# Altium PCB PD Stepper V1.PcbDoc (part 1 of 2)
Units mm, origin at the board's own origin, x right, y up, seen from the top; angles counter-clockwise.
Board outline 42.3 x 42.32 mm, 4 copper layers (Top Layer, Int1 (GND), Int2 (PWR), Bottom Layer), stack 1.451 mm thick; 69 components, 55 nets, 310 pads, 250 vias.
Unrouted connection lines stored in the file: 77.
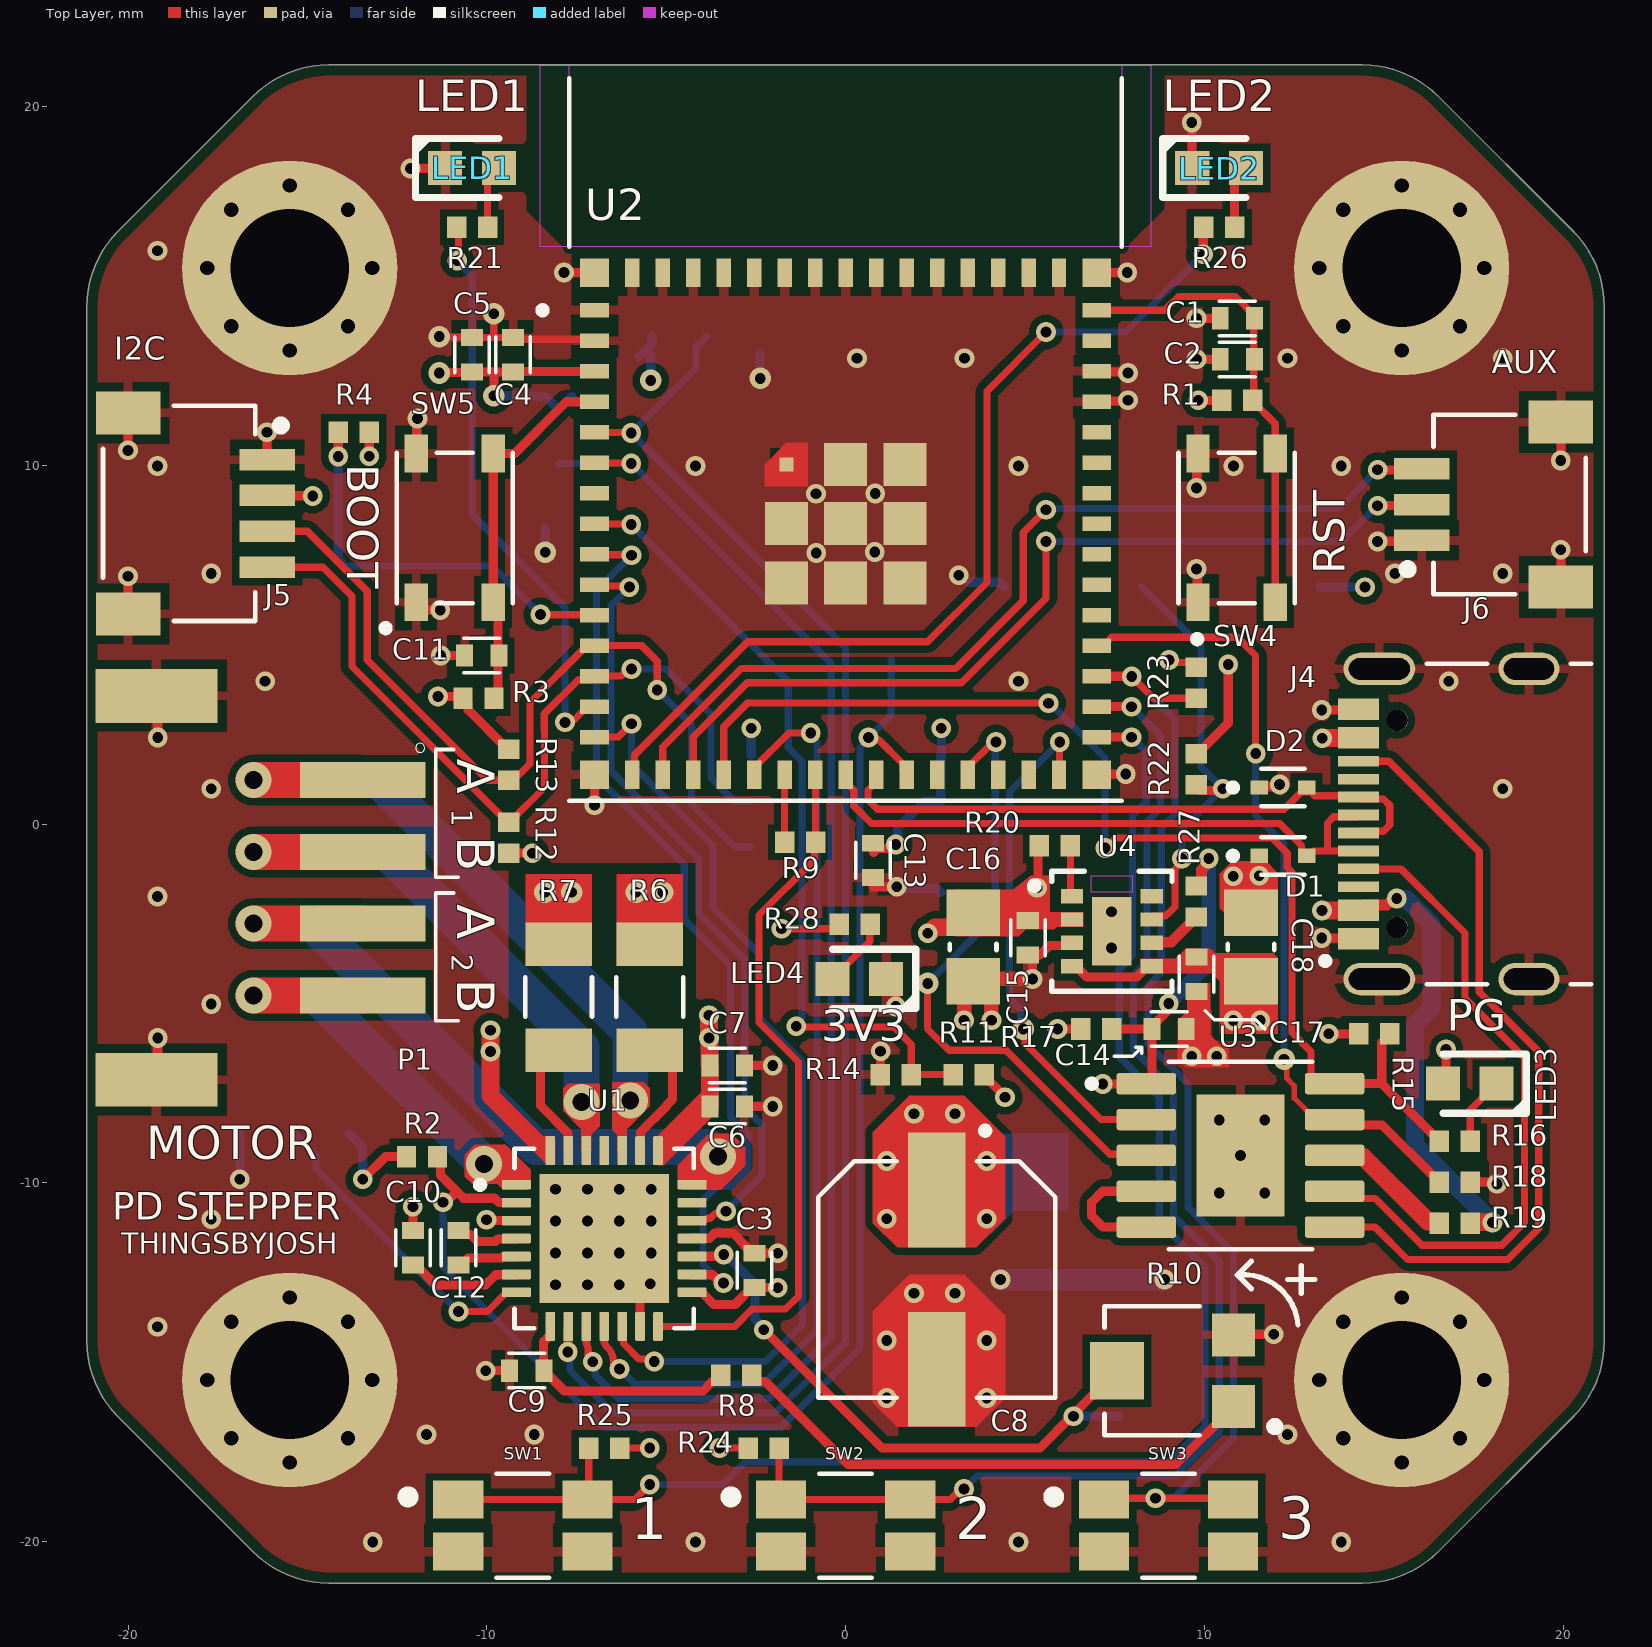
[diagram p0: Top Layer view]
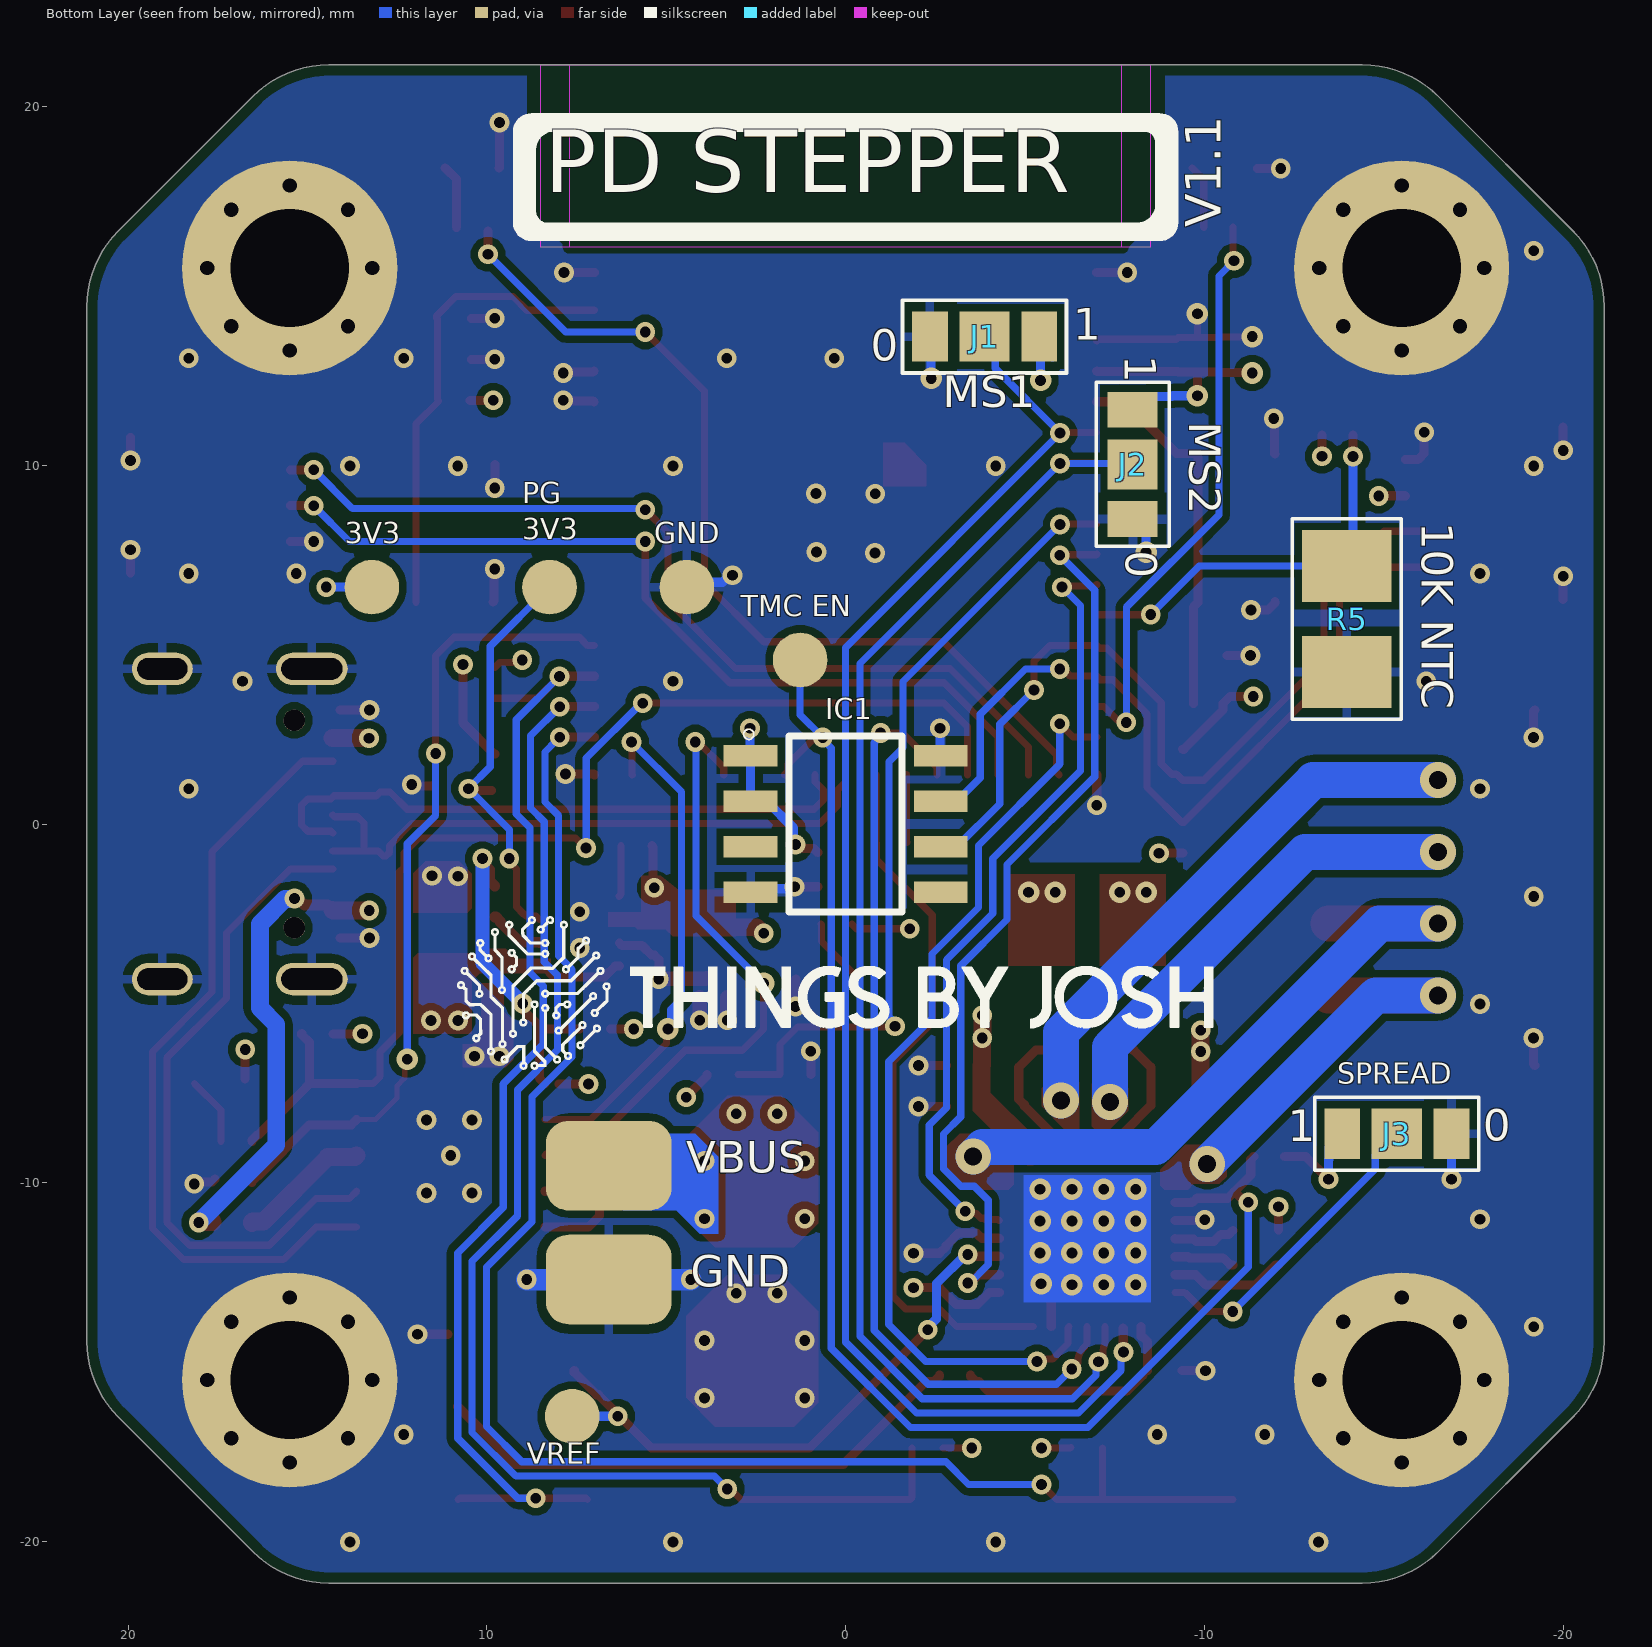
[diagram p1: Bottom Layer view, seen from below]
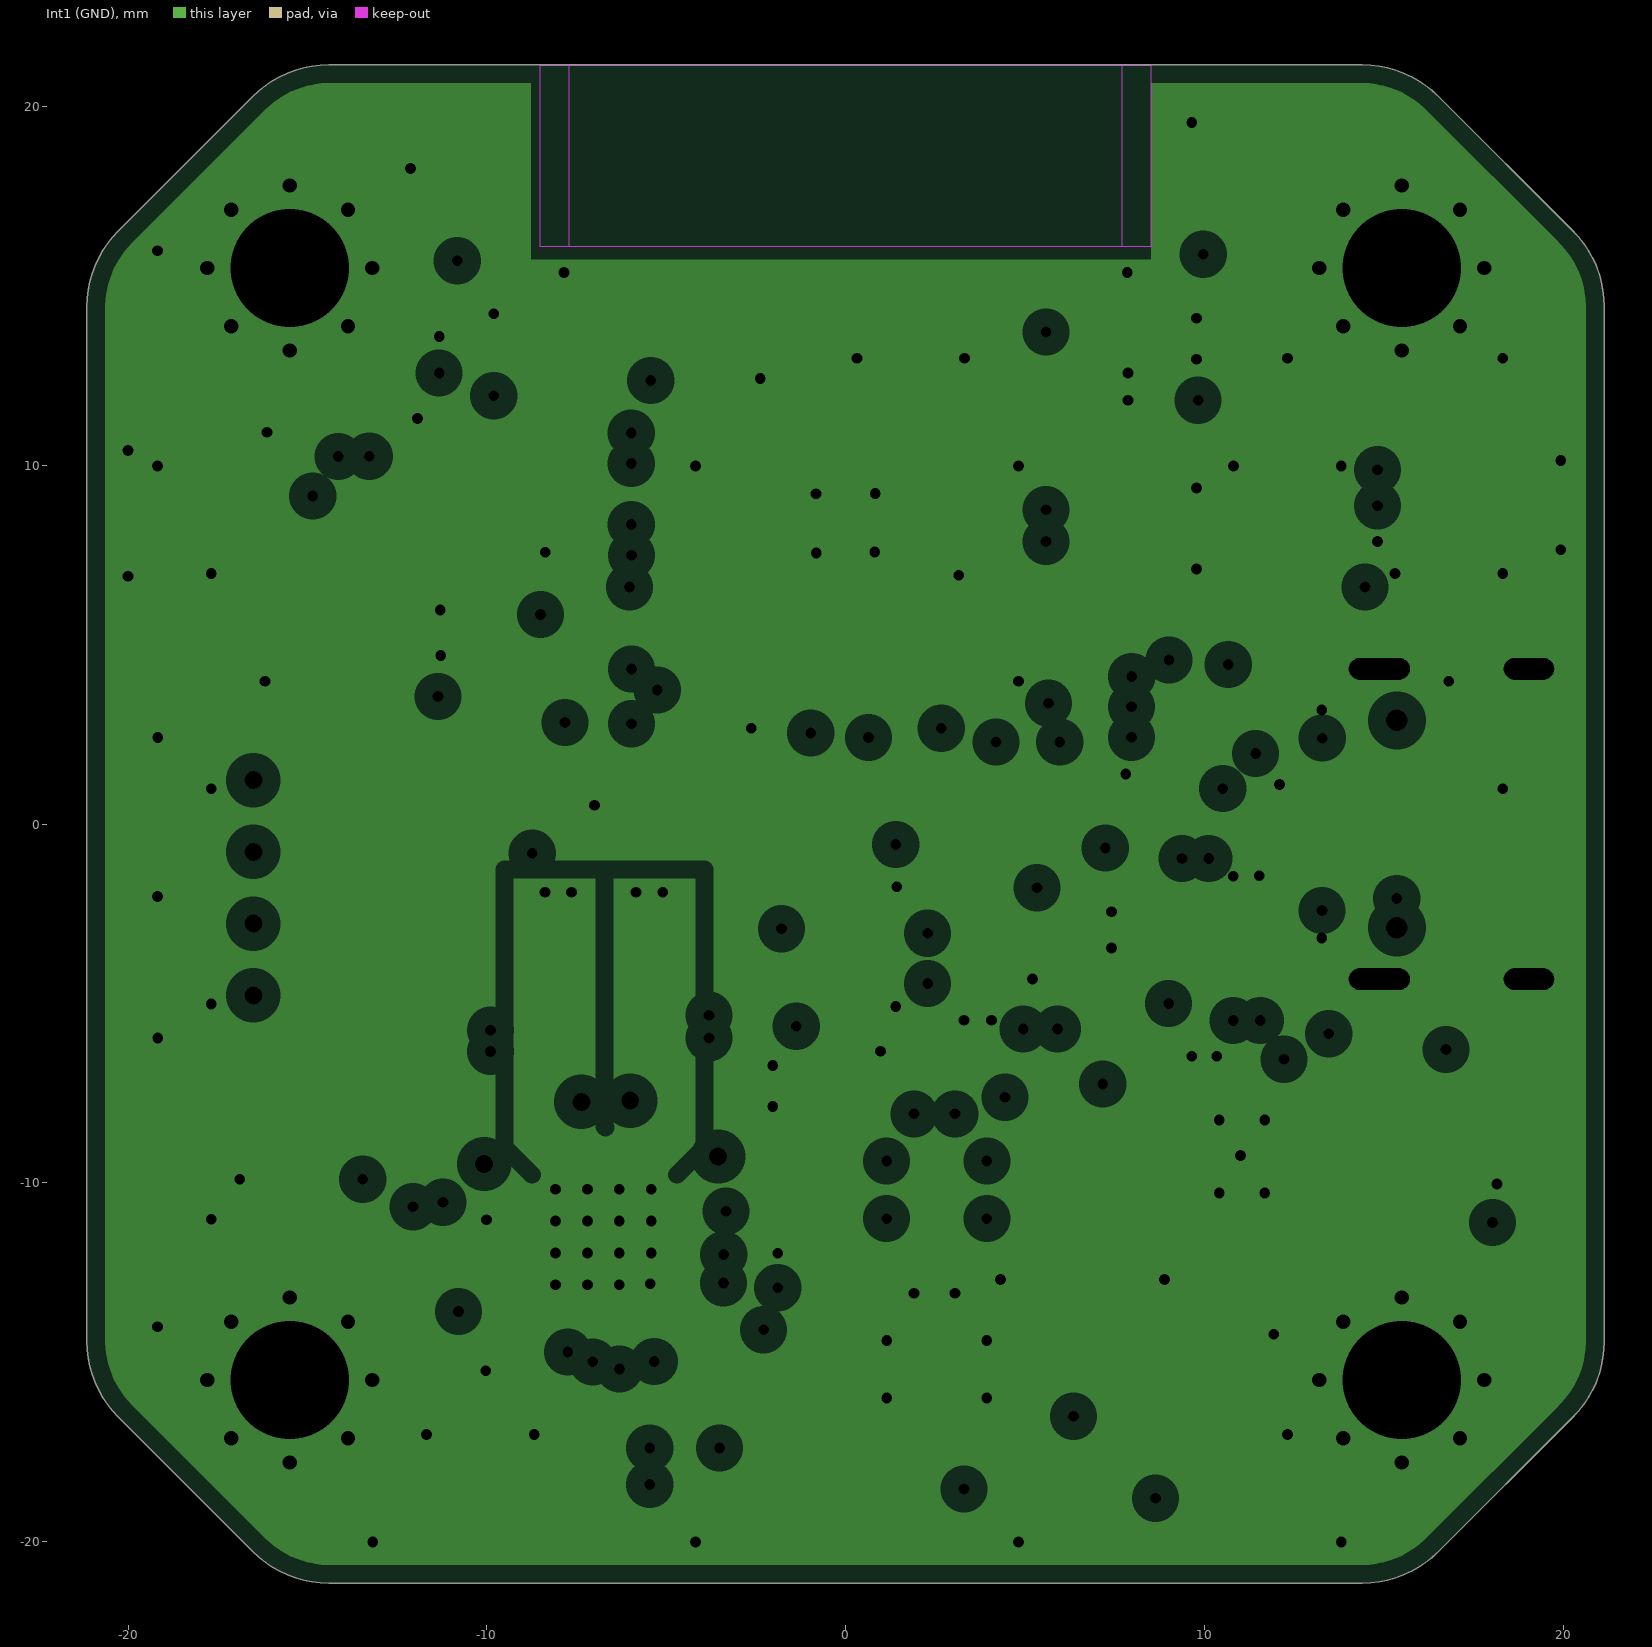
[diagram p2: Int1 (GND), clearances drawn from the general rule]
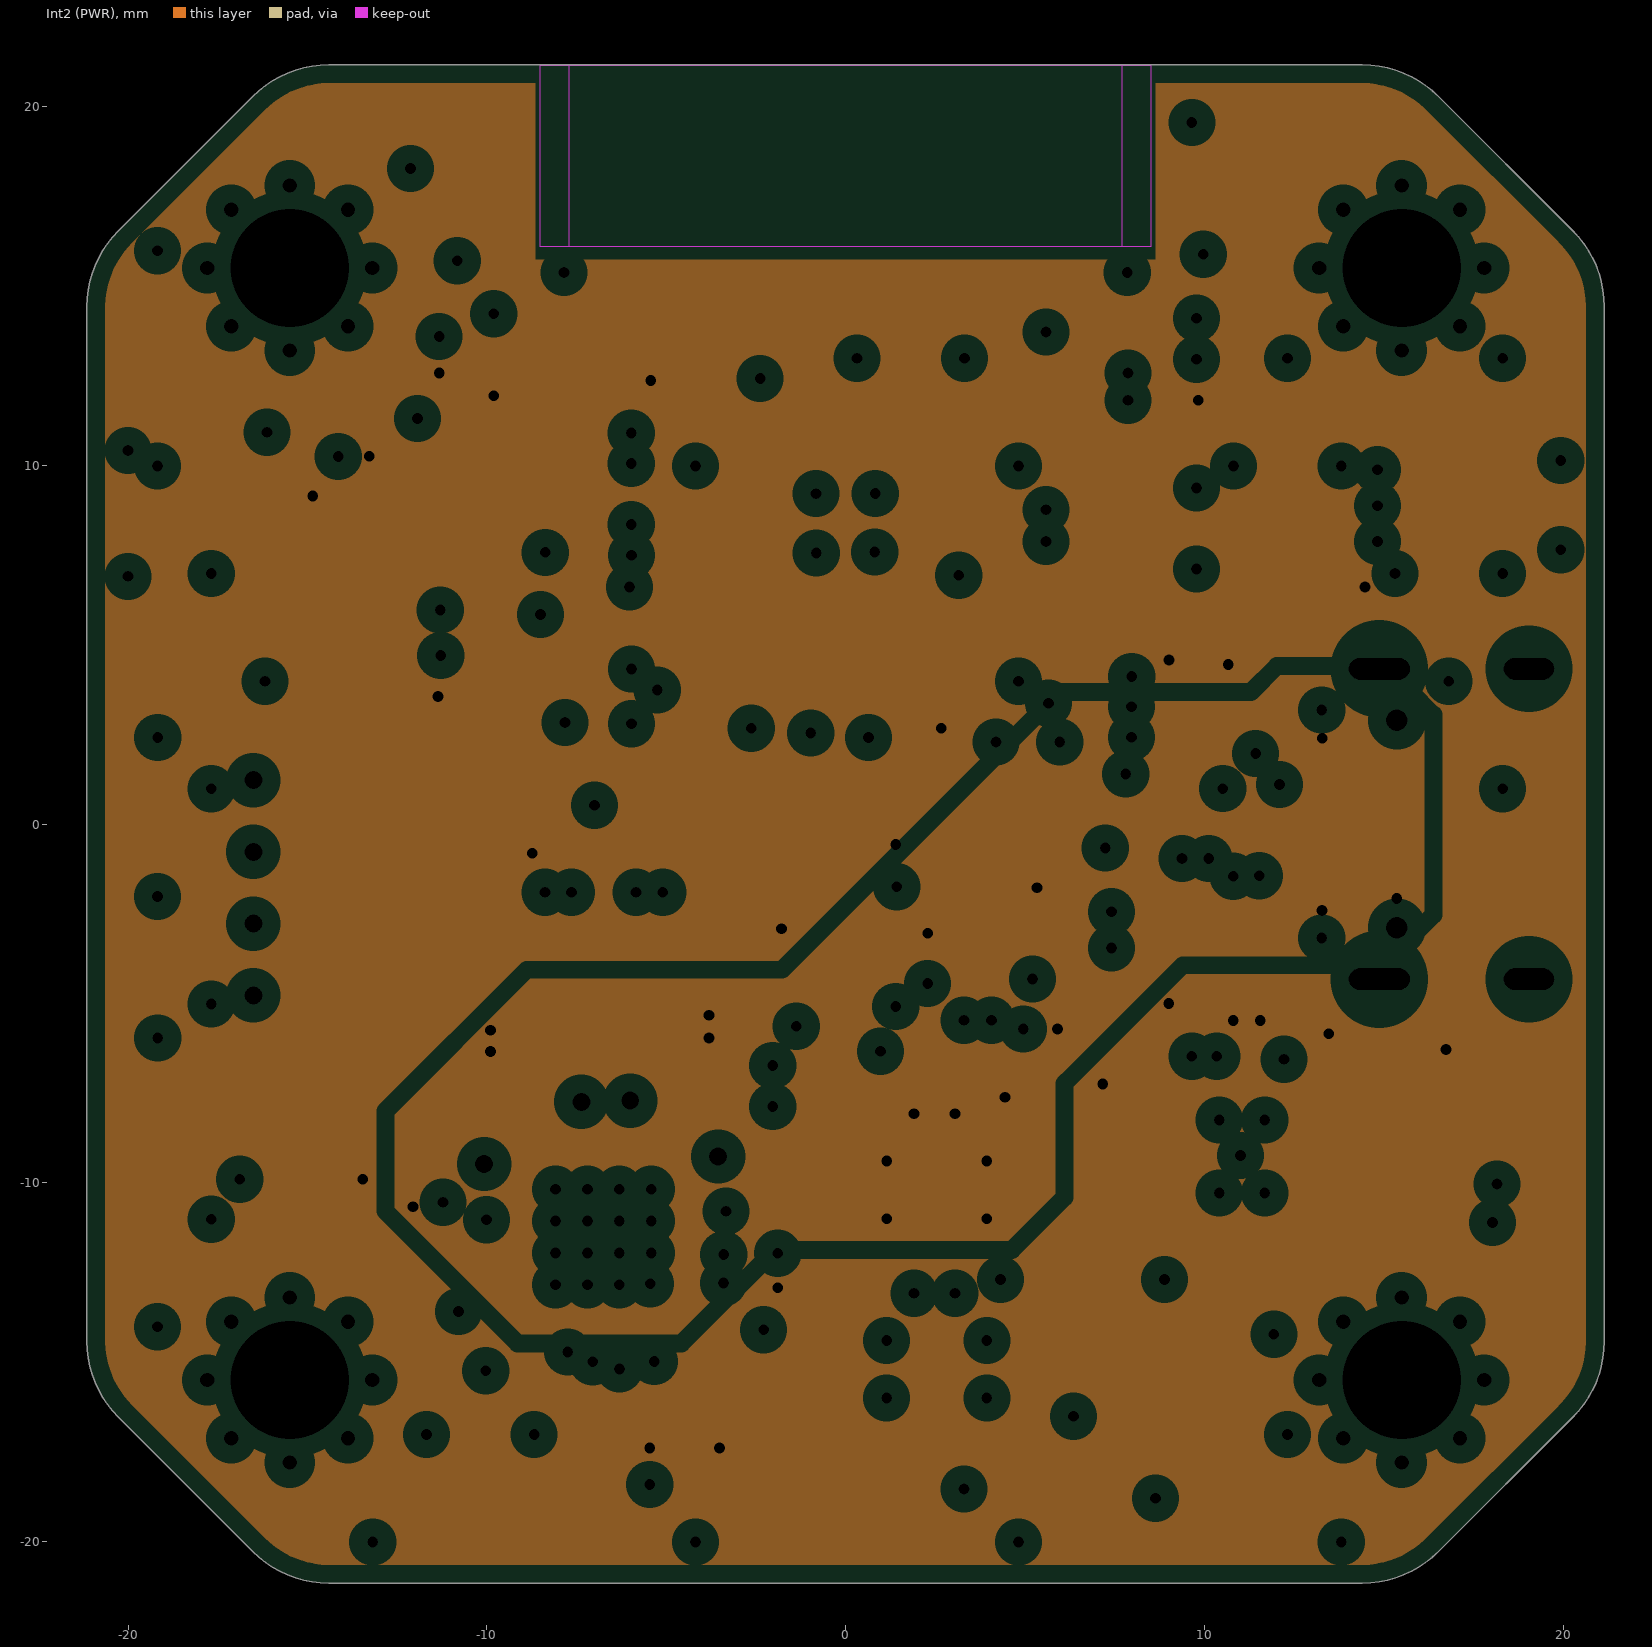
[diagram p3: Int2 (PWR), clearances drawn from the general rule]
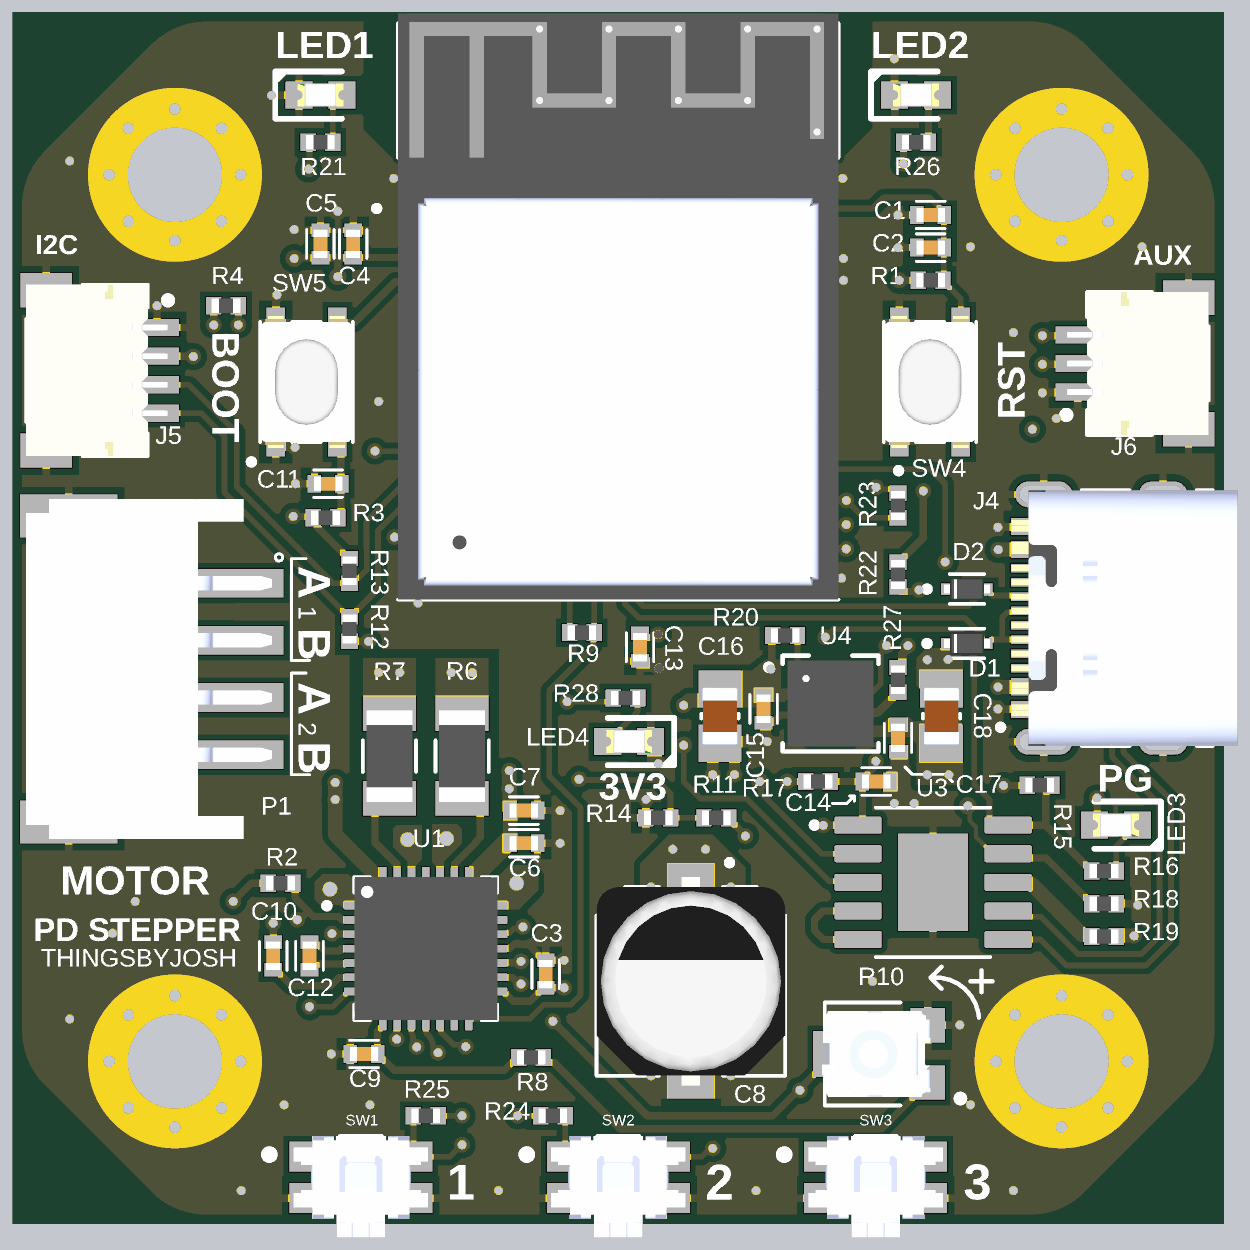
[diagram p5: 3D render of the assembled board from above, using the file's embedded part models]

## Layer stack, top to bottom
Top Solder: solder mask 0.0254, SM-001, Dk 4
Top Layer: signal copper 0.035
Dielectric 2: prepreg 0.3, PP-017, Dk 4.3
Int1 (GND): plane copper 0.035, net GND
Dielectric 3: core 0.7112, Core-039, Dk 4.8
Int2 (PWR): plane copper 0.035, net (Multiple Nets)
Dielectric 4: prepreg 0.3, PP-017, Dk 4.3
Bottom Layer: signal copper 0.035
Bottom Solder: solder mask 0.0254, SM-001, Dk 4

## Board outline
-20.271,-16.539 -16.529,-20.281 ccw(c-14.407,-18.16) -14.407,-21.16 14.407,-21.16 ccw(c14.407,-18.16) 16.529,-20.281 20.271,-16.539 ccw(c18.15,-14.417) 21.15,-14.417 21.15,14.417 ccw(c18.15,14.417) 20.271,16.539 16.529,20.281 ccw(c14.407,18.16) 14.407,21.16 -14.407,21.16 ccw(c-14.407,18.16) -16.529,20.281 -20.271,16.539 ccw(c-18.15,14.417) -21.15,14.417 -21.15,-14.417 ccw(c-18.15,-14.417)

## Design rules (kind name [scope] priority, off if disabled: settings)
BoardOutlineClearance BoardOutlineClearance_SILK [OnLayer('Top Overlay')] p1: gap=0.05 ignorepadtopadclearanceinfootprint=FALSE except(0: Arc-SplitContinuation Track-SplitContinuation SMDPad-SplitContinuation THPad-SplitContinuation Via-SplitContinuation Fill-SplitContinuation Poly-SplitContinuation Region-SplitContinuation Text-SplitContinuation)
BoardOutlineClearance [All] p2: gap=0.3 ignorepadtopadclearanceinfootprint=FALSE except(0: Arc-SplitContinuation Track-SplitContinuation SMDPad-SplitContinuation THPad-SplitContinuation Via-SplitContinuation Fill-SplitContinuation Poly-SplitContinuation Region-SplitContinuation Text-SplitContinuation; 0.2: SMDPad-OutlineEdge)
Clearance [All] p1: gap=0.2 ignorepadtopadclearanceinfootprint=TRUE except(0: Arc-Hole Track-Hole SMDPad-Hole THPad-Hole Via-Hole Fill-Hole Poly-Hole Region-Hole Text-Hole)
DiffPairsRouting [All] p1: maxlimit=0.254 minlimit=0.2 mostfreqgap=0.254 toplayer_minwidth=0.15 toplayer_maxwidth=0.381 toplayer_prefwidth=0.2 bottomlayer_minwidth=0.15 bottomlayer_maxwidth=0.381 bottomlayer_prefwidth=0.2 maxuncoupledlength=12.7
HoleSize [All] p1: absolutevalues=TRUE maxlimit=5 minlimit=0.3 maxpercent=80.000 minpercent=20.000
MinimumSolderMaskSliver [All] p1: minsoldermaskwidth=0.1
PlaneClearance [All] p1: clearance=0.508
PlaneConnect [All] p1: planeconnectstyle=Direct reliefexpansion=0.508 reliefentries=4 reliefconductorwidth=0.254 reliefairgap=0.254
PolygonConnect [All] p1: thpad.connectstyle=Relief thpad.reliefconductorwidth=0.254 thpad.reliefentries=4 thpad.polygonreliefangle="90 Angle" thpad.airgapwidth=0.254 smdpad.connectstyle=Relief smdpad.reliefconductorwidth=0.254 smdpad.reliefentries=4 smdpad.polygonreliefangle="90 Angle" smdpad.airgapwidth=0.254 via.connectstyle=Direct via.reliefconductorwidth=0.254 via.reliefentries=4 via.polygonreliefangle="90 Angle" via.airgapwidth=0.254
RoutingVias [All] p1: holewidth=0.711 width=1.27 viastyle="Through Hole" minholewidth=0.711 minwidth=1.27 maxholewidth=0.711 maxwidth=1.27
SilkToSilkClearance [All] p1: silktosilkclearance=0.1
SilkToSolderMaskClearance [IsPad] p1: minsilkscreentomaskgap=0.12 clearancetoexposedcopper=TRUE
SolderMaskExpansion [All] p1: expansion=0.04 istentingtop=FALSE
Width [All] p1: maxlimit=5 minlimit=0.13 preferedwidth=0.2 minimp=50.000000 maximp=50.000000 favimp=50.000000
23 further rules are at their usual default settings.

## Classes and differential pairs
differential pair USB_D: +USB_D_P -USB_D_N

## Components (designator, comment, footprint, x,y, rotation, side; value= is the part's Value field where it differs from the comment)
C1 "0.1µF" CAPC1005X55N 10.922,14.097 r180 top
C2 "1µF ±10% 35V" CAPC1005X55N 10.922,12.954 r180 top
C3 "0.1µF" CAPC1005X55N -2.54,-12.446 r90 top
C4 "1µF ±10% 35V" CAPC1005X55N -9.271,13.081 r90 top
C5 "10uF 6.3V" CAPC1005X55N -10.414,13.081 r90 top
C6 "0.1µF" CAPC1005X55N -3.302,-7.874 r180 top
C7 "0.1µF" CAPC1005X55N -3.302,-6.731 r180 top
C8 "100uF" CAP_EEEFT1V101AP 2.54,-12.7 r270 top
C9 "0.1µF" CAPC1005X55N -8.89,-15.24 r180 top
C10 "0.1µF" CAPC1005X55N -12.065,-11.811 r90 top
C11 "0.1µF" CAPC1005X55N -10.144,4.699 r180 top
C12 "22nF" CAPC1005X55N -10.795,-11.811 r270 top
C13 "0.1µF" CAPC1005X55N 0.762,-1.016 r270 top
C14 "1µF ±10% 35V" CAPC1005X55N 9.017,-5.715 r180 top
C15 "0.1µF" CAPC1005X55N 5.08,-3.175 r90 top
C16 "22uF" CAPC2012X135N 3.556,-3.429 r270 top
C17 "0.1µF" CAPC1005X55N 9.779,-4.191 r90 top
C18 "22uF" CAPC2012X135N 11.303,-3.429 r90 top
D1 "LESD5D5.0CT1G" TVS_LESD5D5.0CT1G 12.192,-0.889 r0 top
D2 "LESD5D5.0CT1G" TVS_LESD5D5.0CT1G 12.192,1.016 r0 top
IC1 "AS5600-ASOT" SOIC127P600X175-8N 0,0 r180 bottom
J1 "MS1" "3 way solder jumper" -3.872,13.589 r0 bottom
J2 "MS2" "3 way solder jumper" -8.001,10.025 r270 bottom
J3 "SPREAD" "3 way solder jumper" -15.367,-8.636 r180 bottom
J4 "TYPE-C-31-M-12" HRO_TYPE-C-31-M-12 19.05,0 r90 top
J5 "JST SH 4P" JST_SM04B-SRSS-TB(LF)(SN) -16.129,8.66 r270 top value=I2C
J6 "JST SH 3P" JST_SM03B-SRSS-TB(LF)(SN) 16.064,8.904 r90 top value=AUX
LED1 "LED BLUE" LEDC1608X80N -10.414,18.288 r0 top
LED2 "LED RED" LEDC1608X80N 10.414,18.288 r0 top
LED3 "LED GREEN" LEDC1608X80N 17.399,-7.239 r180 top
LED4 "LED GREEN" LEDC1608X80N 0.381,-4.318 r180 top
P1 "JST PH 4P" JST_S4B-PH-SM4-TB -13.462,-1.778 r90 top value=MOTOR
R1 "4.7K" RESC1005X37N 10.922,11.811 r180 top
R2 "10K" RESC1005X37N -11.811,-9.271 r180 top
R3 "10K" RESC1005X37N -10.235,3.51 r180 top
R4 "10K" RESC1005X37N -13.716,10.922 r180 top
R5 "10K NTC" "NTC Pads" -13.97,5.715 r90 bottom
R6 "100m" RESC3216X89N -5.461,-4.826 r90 top
R7 "100m" RESC3216X89N -8.001,-4.826 r90 top
R8 "20K" RESC1005X37N -3.048,-15.367 r180 top
R9 "1K" RESC1005X37N -1.27,-0.508 r0 top
R10 "20K POT" TRIM_TC33X-2-203E 9.017,-15.24 r180 top
R11 "20K" RESC1005X37N 3.429,-6.985 r0 top
R12 "4.7K" RESC1005X37N -9.398,-0.381 r270 top
R13 "4.7K" RESC1005X37N -9.398,1.651 r90 top
R14 "2.7K" RESC1005X37N 1.397,-6.985 r0 top
R15 "10K" RESC1005X37N 14.732,-5.842 r180 top
R16 "1K" RESC1005X37N 16.983,-8.844 r0 top
R17 "1K" RESC1005X37N 6.985,-5.715 r180 top
R18 "NF" RESC1005X37N 16.983,-9.987 r0 top
R19 "10K" RESC1005X37N 16.983,-11.13 r180 top
R20 "100K" RESC1005X37N 5.834,-0.607 r180 top
R21 "1K" RESC1005X37N -10.414,16.637 r180 top
R22 "100K" RESC1005X37N 9.779,1.524 r90 top
R23 "10K" RESC1005X37N 9.779,3.937 r90 top
R24 "10K" RESC1005X37N -2.286,-17.399 r180 top
R25 "10K" RESC1005X37N -6.731,-17.399 r0 top
R26 "1K" RESC1005X37N 10.414,16.637 r180 top
R27 "10K" RESC1005X37N 9.779,-2.159 r90 top
R28 "1K" RESC1005X37N 0.254,-2.794 r180 top
SW1 "EVQ-P7J01P" SW_EVQ-P7J01P -9,-19.558 r0 top
SW2 "EVQ-P7J01P" SW_EVQ-P7J01P 0,-19.558 r0 top
SW3 "EVQ-P7J01P" SW_EVQ-P7J01P 9,-19.558 r0 top
SW4 "PTS810_SJM_250_SMTR_LFS" SW_PTS810_SJM_250_SMTR_LFS 10.9,8.255 r90 top
SW5 "PTS810_SJM_250_SMTR_LFS" SW_PTS810_SJM_250_SMTR_LFS -10.9,8.255 r90 top
U1 "TMC2209-LA" QFN50P500X500X90-29N -6.731,-11.557 r0 top
U2 "ESP32-S3-MINI-1-N8" XCVR_ESP32-S3-MINI-1-N8 0,8.372 r0 top
U3 "CH224K" ESSOP-10 11.007,-9.239 r0 top
U4 "MPM3612-33" LGA_MPM3612_MNP 7.422,-2.988 r0 top

## Footprints (in the part's own frame and the unit in brackets; to place one, negate y for a bottom-side part, rotate by r counter-clockwise, add the part's x,y. Pads: shape width x height; smd on the part's side, far side on the other; paste and mask are expansions set on the pad)
"3 way solder jumper" [mm]
  rect 1x1.4 smd paste-2539.97: 1(-1.524,0) 3(1.524,0)
  rect 1.4x1.4 smd paste-2539.97: 2(0,0)
CAP_EEEFT1V101AP [mm]
  rect 3.2x1.6 smd: 1(-2.5,0) 2(2.5,0)
  silkscreen extent -4.25,-3.3 3.3,3.3, body extent -3.65,-3.3 3.65,3.3, height 5.8
CAPC1005X55N [mm]
  rect 0.47x0.62 smd: 1(-0.48,0) 2(0.48,0)
  silkscreen extent -0.5,-0.48 0.5,0.48, body extent -0.5,-0.25 0.5,0.25, height 0.55
CAPC2012X135N [mm]
  rect 1.3x1.5 smd: 1(-0.95,0) 2(0.95,0)
  silkscreen extent -0.08,-0.65 0.08,0.65, body extent -1,-0.63 1,0.63, height 1.44
ESSOP-10 [mm]
  rect 2.45x3.4 smd: 0(0,0)
  rrect25% 1.66x0.6 smd: 1(-2.625,2) 2(-2.625,1) 3(-2.625,0) 4(-2.625,-1) 5(-2.625,-2) 6(2.625,-2) 7(2.625,-1) 8(2.625,0) 9(2.625,1) 10(2.625,2)
  silkscreen extent -4.25,-2.61 2,2.61, body extent -2,-2.54 2,2.54, height 1.8
HRO_TYPE-C-31-M-12 [mm]
  rect 0.6x1.14 smd mask+0.05: A1_B12(-3.2,4.75) A4_B9(-2.4,4.75) B1_A12(3.2,4.75) B4_A9(2.4,4.75)
  rect 0.3x1.14 smd mask+0.05: A5(-1.25,4.75) A6(-0.25,4.75) A7(0.25,4.75) A8(1.25,4.75) B5(1.75,4.75) B6(0.75,4.75) B7(-0.75,4.75) B8(-1.75,4.75)
  oval 0.9x2 hole 0.6 slot 1.7 at 90 deg: S1(-4.325,4.17) S2(4.325,4.17)
  oval 0.9x1.7 hole 0.6 slot 1.4 at 90 deg: S3(-4.325,0) S4(4.325,0)
  round 0.6 hole 0.6 unplated: ""(-2.89,3.68) ""(2.89,3.68)
  silkscreen extent -4.47,-1.74 4.47,5.78, body extent -4.47,-2.6 4.47,5.31, height 3.31
JST_S4B-PH-SM4-TB [mm]
  rect 1x3.5 smd: 1(3,0) 2(1,0) 3(-1,0) 4(-3,0)
  rect 1.5x3.4 smd: P1(5.35,5.75) P2(-5.35,5.75)
  silkscreen extent 3.77,-1.73 4.03,-1.47, body extent -5.95,-1.36 5.95,7.24, height 5.5
JST_SM03B-SRSS-TB(LF)(SN) [mm]
  rect 0.6x1.55 smd: 1(-1,0) 2(0,0) 3(1,0)
  rect 1.2x1.8 smd: S1(-2.3,-3.875) S2(2.3,-3.875)
  silkscreen extent -2.5,-4.57 2.5,0.5, body extent -2.5,-4.57 2.5,0.38, height 3.25
JST_SM04B-SRSS-TB(LF)(SN) [mm]
  rect 0.6x1.55 smd: 1(-1.5,0) 2(-0.5,0) 3(0.5,0) 4(1.5,0)
  rect 1.2x1.8 smd: S1(-2.8,-3.875) S2(2.8,-3.875)
  silkscreen extent -3,-4.57 3,0.49, body extent -3,-4.57 3,0.38, height 3.25
LEDC1608X80N [mm]
  rect 0.95x0.95 smd: 1(-0.75,0) 2(0.75,0)
  silkscreen extent -1.58,-0.82 0.75,0.82, body extent -0.8,-0.4 0.8,0.4, height 0.8
LGA_MPM3612_MNP [mm]
  rect 0.625x0.4 smd paste+0 mask+0: 1(-1.112,0.975) 2(-1.112,0.325) 3(-1.112,-0.325) 4(-1.112,-0.975) 5(1.112,-0.975) 6(1.112,-0.325) 7(1.112,0.325) 8(1.112,0.975)
  rect 1.1x1.9 smd paste+0 mask+0: 11(0,0)
  Top Layer keep-out region: -0.575,1.083 -0.575,1.55 0.575,1.55 0.575,1.083
  silkscreen extent -2.26,-1.68 1.68,1.68, body extent -1.5,-1.5 1.5,1.5, height 1.94
"NTC Pads" [mm]
  rect 2x2.5 smd paste-2539.97: 1(-1.476,0) 2(1.476,0)
QFN50P500X500X90-29N [mm]
  rrect25% 0.81x0.27 smd: 1(-2.45,1.5) 2(-2.45,1) 3(-2.45,0.5) 4(-2.45,0) 5(-2.45,-0.5) 6(-2.45,-1) 7(-2.45,-1.5) 15(2.45,-1.5) 16(2.45,-1) 17(2.45,-0.5) 18(2.45,0) 19(2.45,0.5) 20(2.45,1) 21(2.45,1.5)
  rrect25% 0.27x0.81 smd: 8(-1.5,-2.45) 9(-1,-2.45) 10(-0.5,-2.45) 11(0,-2.45) 12(0.5,-2.45) 13(1,-2.45) 14(1.5,-2.45) 22(1.5,2.45) 23(1,2.45) 24(0.5,2.45) 25(0,2.45) 26(-0.5,2.45) 27(-1,2.45) 28(-1.5,2.45)
  rect 3.6x3.6 smd paste-0.68: 29(0,0)
  silkscreen extent -3.56,-2.5 2.5,2.5, body extent -2.5,-2.5 2.5,2.5, height 0.9
RESC1005X37N [mm]
  rect 0.54x0.6 smd: 1(-0.432,0) 2(0.432,0)
  body extent -0.5,-0.25 0.5,0.25, height 0.37
RESC3216X89N [mm]
  rect 1.21x1.86 smd: 1(-1.476,0) 2(1.476,0)
  silkscreen extent -0.55,-0.93 0.55,0.93, body extent -1.6,-0.8 1.6,0.8, height 0.89
SOIC127P600X175-8N [mm]
  rect 1.5x0.6 smd: 1(-2.65,1.905) 2(-2.65,0.635) 3(-2.65,-0.635) 4(-2.65,-1.905) 5(2.65,-1.905) 6(2.65,-0.635) 7(2.65,0.635) 8(2.65,1.905)
  silkscreen extent -2.84,-2.45 1.58,2.64, body extent -3,-2.45 3,2.45, height 1.75
SW_EVQ-P7J01P [mm]
  rect 1.4x1.05 smd: 1_1(-1.8,0.725) 1_2(1.8,0.725) 2_1(-1.8,-0.725) 2_2(1.8,-0.725)
  silkscreen extent -3.34,-1.45 0.73,1.45, body extent -2.35,-2.1 2.35,1.45, height 1.35
SW_PTS810_SJM_250_SMTR_LFS [mm]
  rect 1.05x0.65 smd: 1(-2.075,1.075) 2(2.075,1.075) 3(-2.075,-1.075) 4(2.075,-1.075)
  silkscreen extent -3.2,-1.62 2.1,1.62, body extent -2.3,-1.6 2.3,1.6, height 2.7
TRIM_TC33X-2-203E [mm]
  rect 1.2x1.2 smd: 1(-1.8,1) 3(-1.8,-1)
  rect 1.5x1.6 smd: 2(1.45,0)
  silkscreen extent -3.07,-1.8 1.8,1.8, body extent -1.9,-1.5 1.9,1.5, height 1.1
TVS_LESD5D5.0CT1G [mm]
  rect 0.48x0.4 smd: 1(-0.66,0) 2(0.66,0)
  silkscreen extent -1.5,-0.52 0.6,0.52, body extent -0.8,-0.4 0.8,0.4, height 0.7
XCVR_ESP32-S3-MINI-1-N8 [mm]
  rect 0.8x0.4 smd: 1(-7,5.95) 2(-7,5.1) 3(-7,4.25) 4(-7,3.4) 5(-7,2.55) 6(-7,1.7) 7(-7,0.85) 8(-7,0) 9(-7,-0.85) 10(-7,-1.7) 11(-7,-2.55) 12(-7,-3.4) 13(-7,-4.25) 14(-7,-5.1) 15(-7,-5.95) 31(7,-5.95) 32(7,-5.1) 33(7,-4.25) 34(7,-3.4) 35(7,-2.55) 36(7,-1.7) 37(7,-0.85) 38(7,0) 39(7,0.85) 40(7,1.7) 41(7,2.55) 42(7,3.4) 43(7,4.25) 44(7,5.1) 45(7,5.95)
  rect 0.4x0.8 smd: 16(-5.95,-7) 17(-5.1,-7) 18(-4.25,-7) 19(-3.4,-7) 20(-2.55,-7) 21(-1.7,-7) 22(-0.85,-7) 23(0,-7) 24(0.85,-7) 25(1.7,-7) 26(2.55,-7) 27(3.4,-7) 28(4.25,-7) 29(5.1,-7) 30(5.95,-7) 46(5.95,7) 47(5.1,7) 48(4.25,7) 49(3.4,7) 50(2.55,7) 51(1.7,7) 52(0.85,7) 53(0,7) 54(-0.85,7) 55(-1.7,7) 56(-2.55,7) 57(-3.4,7) 58(-4.25,7) 59(-5.1,7) 60(-5.95,7)
  rect 1.2x1.2 smd: 61(0,0) 61_2(0,1.65) 61_3(1.65,1.65) 61_4(1.65,0) 61_5(1.65,-1.65) 61_6(0,-1.65) 61_7(-1.65,-1.65) 61_8(-1.65,0)
  rect 0.4x0.4 smd paste-1 mask+0: 61_1(-1.65,1.65)
  rect 0.8x0.8 smd: 62(-7,7) 63(-7,-7) 64(7,-7) 65(7,7)
  Top Layer region: -1.05,1.05 -2.25,1.05 -2.25,1.65 -1.65,2.25 -1.05,2.25
  Keep-Out Layer region: 7.7,7.725 -7.7,7.725 -7.7,12.775 7.7,12.775
  Keep-Out Layer region: 8.509,7.725 -8.509,7.725 -8.509,12.775 8.509,12.775
  silkscreen extent -8.55,-7.73 7.7,12.42, body extent -7.7,-7.73 7.7,12.78, height 2.55

## Part data
C1 C3 C6 C7 C9 C10 C11 C13 C15 C17: library part CL05A105KL5NRNC, "CAP 0.1µF 35V 0402", Package="0402 Samsung", Voltage=35V, Availability=Warning, Check_prices=0.1µF, DigiKey-Purchase-URL=https://snapeda.com/shop?store=DigiKey&id=3598233, MF=Samsung, Mouser-Purchase-URL=https://snapeda.com/shop?store=Mouser&id=3598233, MP=CL05A105KL5NRNC, Price=None, SnapEDA_Link=https://www.snapeda.com/parts/CL05A105KL5NRNC/Samsung/view-part/3598233/?ref=snap
C2 C4 C14: library part CL05A105KL5NRNC, "CAP 1µF ±10% 35V Ceramic Capacitor X5R 0402 (1005 Metric)", Package="0402 Samsung", Voltage=35V, Availability=Warning, Check_prices=1µF, DigiKey-Purchase-URL=https://snapeda.com/shop?store=DigiKey&id=3598233, MF=Samsung, Mouser-Purchase-URL=https://snapeda.com/shop?store=Mouser&id=3598233, MP=CL05A105KL5NRNC, Price=None, SnapEDA_Link=https://www.snapeda.com/parts/CL05A105KL5NRNC/Samsung/view-part/3598233/?ref=snap
C5: library part CL05A105KL5NRNC, "CAP 10µF 6.3V 0402", Package="0402 Samsung", Voltage=6.3V, Availability=Warning, Check_prices=10µF, DigiKey-Purchase-URL=https://snapeda.com/shop?store=DigiKey&id=3598233, MF=Samsung, Mouser-Purchase-URL=https://snapeda.com/shop?store=Mouser&id=3598233, MP=CL05A105KL5NRNC, Price=None, SnapEDA_Link=https://www.snapeda.com/parts/CL05A105KL5NRNC/Samsung/view-part/3598233/?ref=snap
C8: library part EEEFT1V101AP, "CAP 100µF 35V 260mOhm @ 100kHz 2000 Hrs @ 105°C", Package="RADIAL-2 Panasonic", Voltage=35V, Availability="In Stock", Check_prices=https://www.snapeda.com/parts/EEE-FT1V101AP/Panasonic%20Electronic%20Components/view-part/423624/?ref=eda, MF=Panasonic, MP=EEE-FT1V101AP, Price=None, Purchase-URL=https://pricing.snapeda.com/search/part/EEE-FT1V101AP/?ref=eda, SnapEDA_Link=https://www.snapeda.com/parts/EEE-FT1V101AP/Panasonic%20Electronic%20Components/view-part/423624/?ref=snap
C12: library part CL05A105KL5NRNC, "CAP 22nF 50V 0402", Package="0402 Samsung", Voltage=50V, Availability=Warning, Check_prices=22nF, DigiKey-Purchase-URL=https://snapeda.com/shop?store=DigiKey&id=3598233, MF=Samsung, Mouser-Purchase-URL=https://snapeda.com/shop?store=Mouser&id=3598233, MP=CL05A105KL5NRNC, Price=None, SnapEDA_Link=https://www.snapeda.com/parts/CL05A105KL5NRNC/Samsung/view-part/3598233/?ref=snap
C16 C18: library part GRM21BR61E226ME44K, "CAP 22uF 25V", Package="0805 Murata", Voltage=25V, Availability=Unavailable, Check_prices=https://www.snapeda.com/parts/GRM21BR61E226ME44K/Murata%20Electronics%20North%20America/view-part/1836557/?ref=eda, MF="Murata Electronics", MP=GRM21BR61E226ME44K, Price=None, SnapEDA_Link=https://www.snapeda.com/parts/GRM21BR61E226ME44K/Murata%20Electronics%20North%20America/view-part/1836557/?ref=snap
D1 D2: "Transient Voltage Suppressors for ESD Protection", Package=None, Availability="Not in stock", Check_prices=https://www.snapeda.com/parts/LESD5D5.0CT1G/Leshan+Radio+Co./view-part/?ref=eda, MF="Leshan Radio Co.", MP=LESD5D5.0CT1G, Price=None, SnapEDA_Link=https://www.snapeda.com/parts/LESD5D5.0CT1G/Leshan+Radio+Co./view-part/?ref=snap
IC1: "Hall Effect Sensor Angle External Magnet, Not Included Gull Wing", Package="SOIC-8 ams", Availability="In Stock", Check_prices=https://www.snapeda.com/parts/AS5600-ASOT/ams/view-part/?ref=eda, MF=ams, MP=AS5600-ASOT, Price=None, Purchase-URL=https://pricing.snapeda.com/search/part/AS5600-ASOT/?ref=eda, SnapEDA_Link=https://www.snapeda.com/parts/AS5600-ASOT/ams/view-part/?ref=snap
J1 J2 J3: library part "3 Way Solder Jumper"
J4: "USB Connectors 24 Receptacle 1 8.94*7.3mm RoHS", Package=Package, Availability="Not in stock", Check_prices=https://www.snapeda.com/parts/TYPE-C-31-M-12/HRO+Electronics+Co.%252C+Ltd./view-part/?ref=eda, MF="HRO Electronics Co., Ltd.", MP=TYPE-C-31-M-12, Price=None, SnapEDA_Link=https://www.snapeda.com/parts/TYPE-C-31-M-12/HRO+Electronics+Co.%252C+Ltd./view-part/?ref=snap
J5: library part SM04B-SRSS-TB(LF)(SN), "SH Series 1.0 mm Pitch 2 Position Single Row Side Entry Shrouded Header", Package=None, Availability=Unavailable, MP=SM04B-SRSS-TB(LF)(SN), Price=None
J6: library part SM03B-SRSS-TB(LF)(SN), "Connector Header Surface Mount, Right Angle 3 position 0.039 _1.00mm_", Package=None, Availability=Unavailable, MF="JST Sales", MP=SM03B-SRSS-TB_LF__SN_, Price=None, SnapEDA_Link=https://www.snapeda.com/parts/SM03B-SRSS-TB%28LF%29%28SN%29/JST%20Sales%20America%20Inc./view-part/3227115/?ref=snap
LED1: library part 150060GS75000, "BLUE LED Indication - 0603 (1608 Metric)", Package="0603 WÃ¼rth Elektronik", 150060GS75000=150060GS75000, Availability=Warning, DigiKey-Purchase-URL=https://snapeda.com/shop?store=DigiKey&id=548131, MF="Wurth Electronics", Mouser-Purchase-URL=https://snapeda.com/shop?store=Mouser&id=548131, MP=150060GS75000, Price=None, SnapEDA_Link=https://www.snapeda.com/parts/150060GS75000/Wurth%20Electronics%20Inc./view-part/548131/?ref=snap
LED2: library part 150060GS75000, "RED LED Indication - 0603 (1608 Metric)", Availability=Warning, DigiKey-Purchase-URL=https://snapeda.com/shop?store=DigiKey&id=548131, MF="Wurth Electronics", Mouser-Purchase-URL=https://snapeda.com/shop?store=Mouser&id=548131, Price=None
LED3 LED4: library part 150060GS75000, "Green 520nm LED Indication - Discrete 3.2V 0603 (1608 Metric)", Package="0603 WÃ¼rth Elektronik", 150060GS75000=150060GS75000, Availability=Warning, DigiKey-Purchase-URL=https://snapeda.com/shop?store=DigiKey&id=548131, MF="Wurth Electronics", Mouser-Purchase-URL=https://snapeda.com/shop?store=Mouser&id=548131, MP=150060GS75000, Price=None, SnapEDA_Link=https://www.snapeda.com/parts/150060GS75000/Wurth%20Electronics%20Inc./view-part/548131/?ref=snap
P1: library part S4B-PH-SM4-TB, "Connector Header Surface Mount, Right Angle 4 position 0.079 _2.00mm_", Package=None, Availability=Unavailable, MF="JST Sales", MP=S4B-PH-SM4-TB, Price=None, SnapEDA_Link=https://www.snapeda.com/parts/S4B-PH-SM4-TB/JST%20Sales%20America%20Inc./view-part/473686/?ref=snap
R1 R12 R13: library part AC0402JR-0724KL, "RES 4.7K 0402", Package=None, Availability=Unavailable, MP=AC0402JR-0724KL, Price=None
R2 R3 R4 R15 R19 R23 R24 R25 R27: library part AC0402JR-0724KL, "RES 10K 0402", Package=None, Availability=Unavailable, MP=AC0402JR-0724KL, Price=None
R5: library part NTC, "NTC 10K"
R6 R7: library part PE1206FRF470R1L, "Res Metal Foil 1206 100m Ohm 1% 1W Â±100ppm/Â°C Molded SMD Paper T/R", Package=None, Availability=Unavailable, MP=PE1206FRF470R1L, Price=None
R8 R11: library part AC0402JR-0724KL, "RES 20K 0402", Package=None, Availability=Unavailable, MP=AC0402JR-0724KL, Price=None
R9 R16 R17 R21 R26 R28: library part AC0402JR-0724KL, "RES 1K 0402", Package=None, Availability=Unavailable, MP=AC0402JR-0724KL, Price=None
R10: library part TC33X-2-203E, "20k Ohms 0.1W, 1/10W J Lead Surface Mount Trimmer Potentiometer Cermet 1 Turn Top Adjustment", Package="1608 Bourns", Check_prices=https://www.snapeda.com/parts/TC33X-2-203E/Bourns/view-part/312812/?ref=eda, Digi-Key_Part_Number=TC33X-2-203ECT-ND, MF=Bourns, MP=TC33X-2-203E, Purchase-URL=https://pricing.snapeda.com/search/part/TC33X-2-203E/?ref=eda, SnapEDA_Link=https://www.snapeda.com/parts/TC33X-2-203E/Bourns/view-part/312812/?ref=snap
R14: library part AC0402JR-0724KL, "RES 2.7K 0402", Package=None, Availability=Unavailable, MP=AC0402JR-0724KL, Price=None
R18: library part AC0402JR-0724KL, "RES NC", Package=None, Availability=Unavailable, MP=AC0402JR-0724KL, Price=None
R20 R22: library part AC0402JR-0724KL, "RES 100K 0402", Package=None, Availability=Unavailable, MP=AC0402JR-0724KL, Price=None
SW1 SW2 SW3: "Tactile Switch SPST-NO Side Actuated Surface Mount, Right Angle", Package=None, Availability=Unavailable, MF="Panasonic Electronic", MP=EVQ-P7J01P, Price=None, SnapEDA_Link=https://www.snapeda.com/parts/EVQ-P7J01P/Panasonic%20Electronic%20Components/view-part/523087/?ref=snap
SW4 SW5: "Tactile Switch SPST-NO Top Actuated Surface Mount", Package=None, Check_prices=https://www.snapeda.com/parts/PTS810%20SJM%20250%20SMTR%20LFS/C%2526K/view-part/?ref=eda, MF=C&K, MP="PTS810 SJM 250 SMTR LFS", SnapEDA_Link=https://www.snapeda.com/parts/PTS810%20SJM%20250%20SMTR%20LFS/C%2526K/view-part/?ref=snap
U1: "Motor / Motion / Ignition Controllers & Drivers Stepper Motor Driver/Controller, 4.75-28V, 2.0A, Step/Dir, QFN28", Package="VFQFN-28 Trinamic", Availability="In Stock", Check_prices=https://www.snapeda.com/parts/TMC2209-LA/Trinamic/view-part/?ref=eda, MF=Trinamic, MP=TMC2209-LA, Price=None, Purchase-URL=https://pricing.snapeda.com/search/part/TMC2209-LA/?ref=eda, SnapEDA_Link=https://www.snapeda.com/parts/TMC2209-LA/Trinamic/view-part/?ref=snap
U2: "Bluetooth, WiFi 802.11b/g/n, Bluetooth v5.0 Transceiver Module 2.4GHz PCB Trace Surface Mount", Package=None, Availability="In Stock", Check_prices=https://www.snapeda.com/parts/ESP32-S3-MINI-1-N8/Espressif+Systems/view-part/?ref=eda, MF="Espressif Systems", MP=ESP32-S3-MINI-1-N8, Price=None, Purchase-URL=https://pricing.snapeda.com/search?q=ESP32-S3-MINI-1-N8&ref=eda, SnapEDA_Link=https://www.snapeda.com/parts/ESP32-S3-MINI-1-N8/Espressif+Systems/view-part/?ref=snap
U3: "USB PD Sink Controller"
U4: Mfr_Name="Monolithic Power Systems", RefDes=RefDes, Type=Type

## Free pads (board coordinates)
  round 6 hole 3.3: 34(-15.5,-15.5) 34(-15.5,15.5) 34(15.5,-15.5) 34(15.5,15.5)
  rrect50% 3.5x2.5 smd far side paste-2539.97: 35(6.604,-12.7) 35(6.604,-9.525)
  round 1.524 smd far side paste-2539.97: 36(1.27,4.572) 36(4.425,6.604) 36(7.62,-16.51) 36(8.255,6.604) 36(13.208,6.604)

## Via types
v1: diameter 0.55, hole 0.3, Top Layer to Bottom Layer, tented both sides, 180 vias
v2: diameter 0.7, hole 0.4, Top Layer to Bottom Layer, tented both sides, 32 vias
v3: diameter 0.6, hole 0.3, Top Layer to Bottom Layer, 16 vias
v4: diameter 0.6, hole 0.3, Top Layer to Bottom Layer, tented both sides, 14 vias
v5: diameter 1, hole 0.5, Top Layer to Bottom Layer, tented both sides, 8 vias

## Nets (pads, with @x,y where several pads share a name; then routed paths per layer and width w, separated by ;. In a path a pad name is that pad's centre, name@x,y a point inside that pad or via, vN(x,y) a via of type N, cw(c..) or ccw(c..) an arc to the next point about the centre after c; other vN are vias at no path point)
3V3: C3.1 C4.1 C5.1 C13.1 C14.2 C17.2 C18.1 IC1.1 IC1.2 J1.1 J2.1 J3.1 J5.2 LED3.2 pad.36@13.208,6.604 R1.2 R2.2 R3.2 R4.1 R12.2 R13.2 R15.2 R17.1 R22.2 R23.2 R24.2 R25.2 R27.2 R28.2 U1.15 U2.3 U3.1 U4.4 U4.5 | length 46.7
  Top Layer w0.2: R25.2@-6.281,-17.381 -6.262,-17.399 v1(-5.461,-17.399) ; v1(-3.519,-17.399) R24.2@-2.718,-17.399 ; v1(-1.788,-2.921) -0.305,-2.921 R28.2@-0.178,-2.794 ; v1(9.017,4.572) 9.084,4.505 9.643,4.505 R23.2@9.779,4.369
  Top Layer w0.254: J5.2@-15.605,9.144 -15.597,9.152 -14.867,9.152 v1(-14.859,9.144) ; v1(-13.462,-9.906) -12.827,-9.271 R2.2@-12.243,-9.271 ; v1(-13.282,10.253) R4.1@-13.282,10.842 ; v1(-11.366,3.556) -10.719,3.556 -10.524,3.361 -10.524,3.179 -9.428,2.083 R13.2@-9.398,2.083 ; v4(-11.332,12.573) -11.318,12.587 -10.428,12.587 C5.1@-10.414,12.601 -9.842,12.601 ; v4(-9.808,11.938) -9.808,12.567 -9.842,12.601 ; R12.2@-9.398,-0.813 v1(-8.735,-0.813) ; U2.3@-7,12.622 -7.011,12.611 -9.261,12.611 C4.1@-9.271,12.601 -9.842,12.601 ; U1.15@-4.281,-13.057 -4.273,-13.065 -4.003,-13.065 -3.673,-13.395 -3.084,-13.395 -2.615,-12.926 v1(-1.893,-12.926) ; 0.778,-0.79 0.886,-0.682 1.209,-0.682 1.317,-0.574 v1(1.397,-0.574) ; U4.4@6.309,-3.963 6.422,-3.963 6.724,-4.265 8.12,-4.265 8.422,-3.963 U4.5@8.534,-3.963 ; v1(7.168,-7.247) U3.1@7.993,-7.247 ; R17.1@7.417,-5.715 C14.2@8.537,-5.715 8.537,-7.084 U3.1@8.382,-7.239 ; C14.2@8.545,-5.707 8.545,-5.632 v1@8.962,-5.215 ; R22.2@9.779,1.956 9.809,1.956 10.668,2.815 v1(10.668,4.445) ; v1(9.827,11.811) R1.2@10.474,11.811 ; v1(13.467,-5.85) R15.2@14.292,-5.85 ; LED3.2@16.74,-7.113 v1(16.74,-6.288)
  Top Layer w0.3: R27.2@9.779,-1.727 9.922,-1.584 9.922,-1.276 10.059,-1.139 10.059,-1.031 v1(10.126,-0.964)
  Bottom Layer w0.254: J3.1@-13.843,-8.636 -13.47,-9.009 -13.47,-9.35 -13.462,-9.358 v1(-13.462,-9.906) v1@-13.519,-9.963 ; v4(-9.808,11.938) -9.119,11.938 -9.103,11.922 -8.374,11.922 J2.1@-8.001,11.549 J2.1@-7.628,11.922 ; J1.1@-5.769,13.016 -5.396,13.389 J1.1@-5.396,13.589 ; v4(-5.434,12.366) J1.1@-5.434,13.055 ; v1(1.397,-0.574) 1.454,-0.517 1.454,-0.111 2.2,0.635 IC1.2@2.65,0.635 IC1.1@2.65,1.905 2.667,1.922 v1(2.667,2.667) ; pad.36@13.208,6.604 v1(14.478,6.604)
  Bottom Layer w0.4: v1(9.005,-5.006) 10.126,-3.885 v1(10.126,-0.964)
  other v1: 10.806,-5.478 11.557,-5.478
5V: C9.1 R8.2 U1.8 | length 6.5
  Top Layer w0.254: C9.1@-8.419,-15.231 -8.419,-14.434 -8.27,-14.285 -8.239,-14.285 -8.231,-14.277 U1.8@-8.231,-14.007 ; C9.1@-8.283,-15.367 -7.838,-15.812 -3.983,-15.812 -3.711,-15.54 -3.623,-15.54 -3.48,-15.397 R8.2@-3.48,-15.367
A1: P1.1 U1.24 | length 18.4
  Top Layer w1: v5(-16.51,1.222) P1.1@-13.462,1.222
  Bottom Layer w1: v5(-16.51,1.222) -13.033,1.222 -6.005,-5.806 v5(-6.005,-7.711)
A2: P1.3 U1.21 | length 18.7
  Top Layer w1: v5(-16.51,-2.778) P1.3@-13.462,-2.778
  Bottom Layer w1: v5(-16.51,-2.778) -14.875,-2.778 -8.646,-9.007 -3.82,-9.007 v5(-3.556,-9.271)
AUX1: J6.2 U2.18 | length 24.4
  Top Layer w0.2: U2.18@-4.25,1.372 -4.25,2.429 -2.742,3.937 3.233,3.937 5.588,6.292 v1(5.588,7.874)
  Top Layer w0.254: v1(14.831,8.874) J6.2@15.478,8.874
  Bottom Layer w0.2: v1(5.588,7.874) 13.831,7.874 v1(14.831,8.874)
AUX2: J6.3 U2.17 | length 25.7
  Top Layer w0.2: U2.17@-5.1,1.372 -5.1,2.145 -2.908,4.337 3.067,4.337 4.953,6.223 4.953,8.128 v1(5.588,8.763)
  Top Layer w0.254: v1(14.831,9.874) J6.3@15.478,9.874
  Bottom Layer w0.2: v1(5.588,8.763) 5.62,8.795 13.752,8.795 v1(14.831,9.874)
B1: P1.2 U1.26 | length 16
  Top Layer w1: v5(-16.51,-0.778) P1.2@-13.462,-0.778
  Bottom Layer w1: v5(-16.51,-0.778) -12.811,-0.778 -7.366,-6.223 v5(-7.366,-7.747)
B2: P1.4 U1.1 | length 11.4
  Top Layer w1: v5(-16.51,-4.778) P1.4@-13.462,-4.778
  Bottom Layer w1: v5(-16.51,-4.778) -14.78,-4.778 v5(-10.08,-9.478)
BUT1: R25.1 SW1.1_1 SW1.1_2 U2.31 | length 44.7
  Top Layer w0.2: SW1.1_1@-10.8,-18.833 SW1.1_2@-7.2,-18.833 ; R25.1@-7.163,-17.399 -7.163,-18.796 SW1.1_2@-7.2,-18.833 ; v1(-5.461,-18.415) -5.879,-18.833 SW1.1_2@-7.2,-18.833
  Top Layer w0.254: U2.31@7,2.422 v1@7.969,2.422
  Bottom Layer w0.2: v1(-5.461,-18.415) -3.429,-18.415 -2.794,-17.78 9.029,-17.78 10.014,-16.795 10.014,-12.358 8.744,-11.088 8.744,-7.601 7.63,-6.487 7.63,-4.052 8.001,-3.681 8.001,0.23 8.382,0.611 8.382,2.009 8.086,2.304 v1@8.086,2.371
  other v1: 7.972,2.419
BUT2: R24.1 SW2.1_1 SW2.1_2 U2.32 | length 37.3
  Top Layer w0.2: R24.1@-1.854,-17.399 -1.854,-18.779 SW2.1_1@-1.8,-18.833 SW2.1_2@1.8,-18.833 2.916,-18.833 3.207,-18.542 v1(3.302,-18.542)
  Top Layer w0.254: U2.32@7,3.272 v1@7.969,3.272
  Bottom Layer w0.2: v1(3.302,-18.542) 3.664,-18.18 9.194,-18.18 10.414,-16.96 10.414,-12.192 9.144,-10.922 9.144,-7.41 8.03,-6.296 8.03,-4.218 8.401,-3.847 8.401,0.064 8.782,0.445 8.782,2.459 v1(7.972,3.269)
BUT3: R23.1 SW3.1_1 SW3.1_2 U2.33 | length 32.6
  Top Layer w0.2: SW3.1_1@7.2,-18.833 7.237,-18.796 v1(8.636,-18.796) 10.763,-18.796 SW3.1_2@10.8,-18.833 ; v1(7.975,4.115) 8.586,3.505 R23.1@9.784,3.505
  Top Layer w0.254: U2.33@7,4.122 7.003,4.119 7.972,4.119 v1(7.975,4.115)
  Bottom Layer w0.2: v1(7.975,4.115) 9.182,2.909 9.182,0.28 8.801,-0.102 8.801,-4.142 8.43,-4.513 8.43,-6.13 9.544,-7.244 9.544,-10.687 10.814,-11.957 10.814,-17.126 9.144,-18.796 v1(8.636,-18.796)
CC1: J4.A5 U3.7 | length 18.6
  Top Layer w0.2: U3.7@13.632,-10.239 13.832,-10.439 14.762,-10.439 16.067,-11.744 18.292,-11.744 18.924,-11.112 18.924,-6.516 17.263,-4.856 17.263,-3.038 15.475,-1.25 J4.A5@14.3,-1.25
CC2: J4.B5 U3.6 | length 22
  Top Layer w0.2: U3.6@13.632,-11.239 14.762,-11.239 15.667,-12.144 18.458,-12.144 19.324,-11.278 19.324,-6.347 17.663,-4.686 17.663,-0.772 15.141,1.75 J4.B5@14.3,1.75
CFG1: R18.1 U2.34 U3.9 | length 22.6
  Top Layer w0.15: v4(12.221,-6.561) 12.293,-6.633 12.293,-7.086 12.507,-7.3 12.507,-7.644 13.102,-8.239 U3.9@13.632,-8.239
  Top Layer w0.2: U2.34@7,4.972 7.2,4.972 7.3,5.072 7.3,5.09 7.417,5.207 10.922,5.207 11.43,4.699 v1(11.43,1.964)
  Top Layer w0.254: U3.9@13.632,-8.239 13.78,-8.387 14.951,-8.387 16.378,-9.814 16.408,-9.814 16.551,-9.957 R18.1@16.551,-9.987
  Bottom Layer w0.2: v1(11.43,1.964) 11.43,0.24 12.221,-0.552 v4(12.221,-6.561)
CFG2: U2.30 U3.2 | length 14.3
  Top Layer w0.2: v4(4.953,-5.715) 4.997,-5.759 4.997,-6.12 7.116,-8.239 U3.2@8.382,-8.239 ; U2.30@5.95,1.372 5.96,1.381 5.96,2.277 v1(5.969,2.286)
  Bottom Layer w0.2: v4(4.953,-5.715) 4.876,-5.638 4.876,-5.169 4.572,-4.865 4.572,0.889 v1(5.969,2.286)
CFG3: U2.27 U3.3 | length 17.6
  Top Layer w0.2: v4(2.286,-4.445) 2.286,-5.715 2.879,-6.308 4.472,-6.308 7.369,-9.205 8.348,-9.205 U3.3@8.382,-9.239 ; U2.27@3.4,1.372 3.4,1.572 4.114,2.286 v1(4.191,2.286)
  Bottom Layer w0.2: v4(2.286,-4.445) 4.172,-2.559 4.172,2.267 v1(4.191,2.286)
DIAG: U1.11 U2.20 | length 26.6
  Top Layer w0.2: U1.11@-6.731,-14.007 -6.731,-14.419 ccw(c-6.531,-14.418) -6.665,-14.566 cw(c-7.049,-14.995) -6.474,-14.996 ccw(c-6.274,-14.995) v1(-6.303,-15.193) ; U2.20@-2.55,1.372 -2.55,1.572 -1.582,2.54 v1(-0.975,2.54)
  Bottom Layer w0.2: v1(-6.303,-15.193) -5.875,-15.621 -2.304,-15.621 -0.8,-14.117 -0.8,2.27 -0.975,2.445 v1(-0.975,2.54)
DIR: U1.19 U2.10 | length 21.8
  Top Layer w0.2: U2.10@-7,6.672 -6.966,6.638 -6.063,6.638 v1(-6.029,6.604) ; U1.19@-4.281,-11.057 -4.246,-11.022 -3.889,-11.022 -3.859,-10.992 -3.772,-10.992 -3.641,-10.862 -3.401,-10.862 v1(-3.334,-10.795)
  Bottom Layer w0.2: v1(-6.029,6.604) -6.544,6.089 -6.544,1.484 -4.1,-0.96 -4.1,-2.495 -2.808,-3.787 -2.808,-7.911 -2.329,-8.39 -2.329,-9.79 v1(-3.334,-10.795)